# EAGLE board Layout_MON-14 (EAGLE 9.7.0)
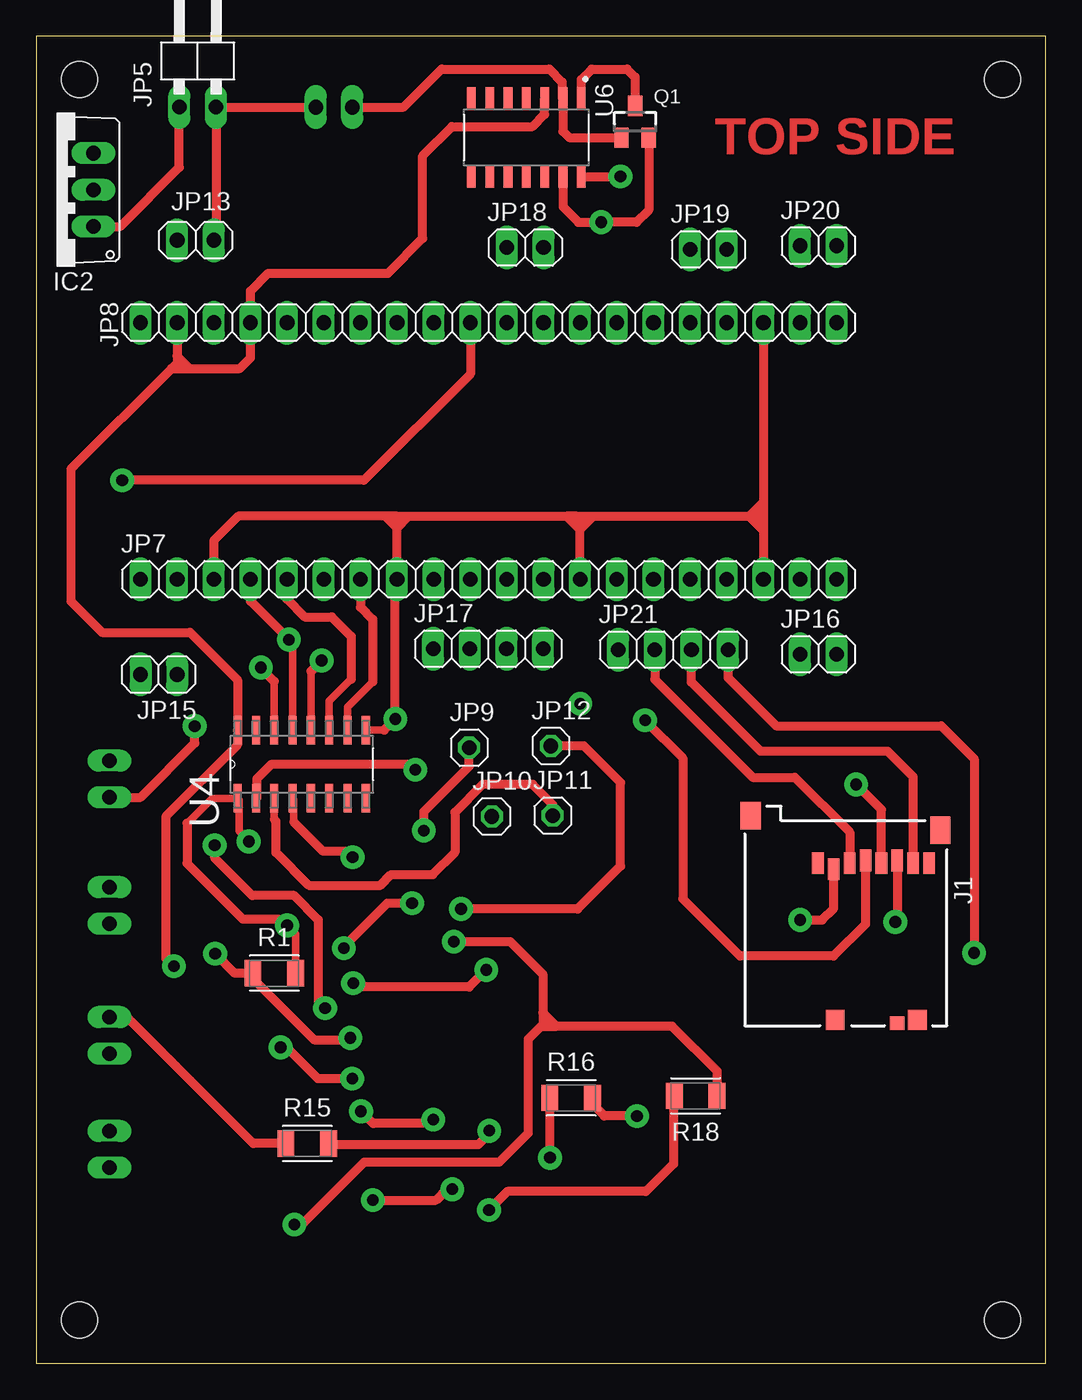
[diagram p0: board, top side]
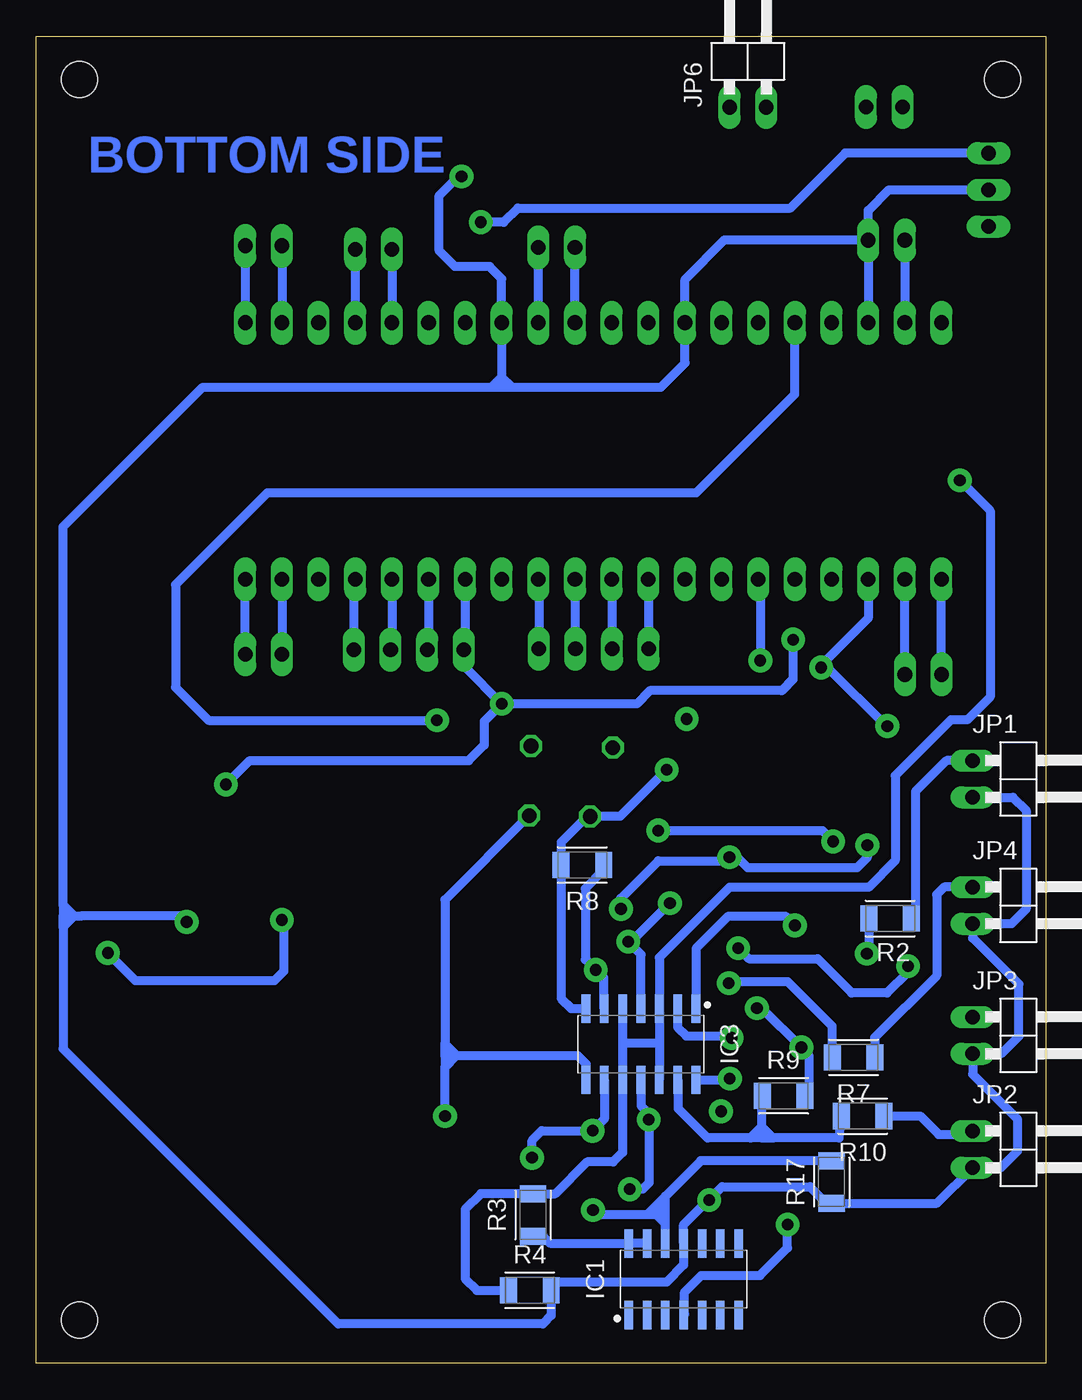
[diagram p1: board, bottom side, seen from below]

Size 70 x 92 mm. Coordinates in mm from the lower left corner, seen from the top.
Outline: 0,0 70,0 70,92 0,92 0,0
Copper layers (1*16): Top 0.035mm / dielectric 1.5mm / Bottom 0.035mm
Design rules "default *": minimum track width 20mil, minimum drill 32mil, track to track 24mil, track to pad 24mil, pad to pad 24mil, via to via 24mil, smd to smd 24mil, copper to edge 40mil, drill to drill 24mil, minimum pad ring 10mil, minimum via ring 8mil, stop-mask expansion 4mil, vias tented up to drill 0mil, thermal gap 10mil
Holes 2.5 mm at 3,89 67,89 3,3 67,3

## Footprints (pad centres in the part's own frame; a part is rotated, then mirrored left to right if it is on the bottom)
SOIC127P600X175-14N = smd 1.968 x 0.599: 1 -2.473,3.81; 2 -2.473,2.54; 3 -2.473,1.27; 4 -2.473,0; 5 -2.473,-1.27; 6 -2.473,-2.54; 7 -2.473,-3.81; 8 2.473,-3.81; 9 2.473,-2.54; 10 2.473,-1.27; 11 2.473,0; 12 2.473,1.27; 13 2.473,2.54; 14 2.473,3.81
TO220V = drill 1.016 long: 1 -2.54,-2.54; 2 0,-2.54; 3 2.54,-2.54
GCT_MEM2051-00-195-00-A = smd 0.8 x 1.5: 1 1.94,-3.66; 2 0.84,-3.26; 3 -0.26,-3.66; 4 -1.36,-3.86; 5 -2.46,-3.66; 6 -3.56,-3.86; 7 -4.66,-3.66; 8 -5.76,-3.66 | smd 1 x 0.95: 9 -3.56,7.425 | smd 1.3 x 1.4: P1 -4.95,7.2; P2 0.75,7.2 | smd 1.4 x 1.9: P3 6.6,-6.95; P4 -6.55,-5.95
1X02/90 = drill 1.016 long: 1 -1.27,-3.81; 2 1.27,-3.81
1X20 = drill 1.016 long: 1 -24.13,0; 2 -21.59,0; 3 -19.05,0; 4 -16.51,0; 5 -13.97,0; 6 -11.43,0; 7 -8.89,0; 8 -6.35,0; 9 -3.81,0; 10 -1.27,0; 11 1.27,0; 12 3.81,0; 13 6.35,0; 14 8.89,0; 15 11.43,0; 16 13.97,0; 17 16.51,0; 18 19.05,0; 19 21.59,0; 20 24.13,0
1X01 = drill 1.016 octagon: 1 0,0
1X02 = drill 1.016 long: 1 -1.27,0; 2 1.27,0
1X04 = drill 1.016 long: 1 -3.81,0; 2 -1.27,0; 3 1.27,0; 4 3.81,0
SSOT-3 = smd 1 x 1.4: 1 -0.95,-1.1; 2 0.95,-1.1; 3 0,1.1
RESC3216X70 = smd 1.165 x 1.815: 1 -1.475,0; 2 1.475,0
SOIC127P600X175-16N = smd 1.981 x 0.559: 1 -2.362,4.445; 2 -2.362,3.175; 3 -2.362,1.905; 4 -2.362,0.635; 5 -2.362,-0.635; 6 -2.362,-1.905; 7 -2.362,-3.175; 8 -2.362,-4.445; 9 2.362,-4.445; 10 2.362,-3.175; 11 2.362,-1.905; 12 2.362,-0.635; 13 2.362,0.635; 14 2.362,1.905; 15 2.362,3.175; 16 2.362,4.445
SOIC127P600X175-14N' = smd 1.55 x 0.6: 1 -2.7,3.81; 2 -2.7,2.54; 3 -2.7,1.27; 4 -2.7,0; 5 -2.7,-1.27; 6 -2.7,-2.54; 7 -2.7,-3.81; 8 2.7,-3.81; 9 2.7,-2.54; 10 2.7,-1.27; 11 2.7,0; 12 2.7,1.27; 13 2.7,2.54; 14 2.7,3.81

## Placement (x,y rotation side)
IC1  LM324_SOIC  [SOIC127P600X175-14N]  25.11,5.84 90 bottom
IC2  LM7805_TO220V  [TO220V]  1.44,81.35 90 top
IC3  LM324_SOIC  [SOIC127P600X175-14N]  28.07,22.13 270 bottom
J1  MEM2051-00-195-00-A  [GCT_MEM2051-00-195-00-A]  56.13,31.01 180 top
JP1  PINHD-1X2/90  [1X02/90]  1.27,40.51 270 bottom
JP2  PINHD-1X2/90  [1X02/90]  1.27,14.84 270 bottom
JP3  PINHD-1X2/90  [1X02/90]  1.27,22.73 270 bottom
JP4  PINHD-1X2/90  [1X02/90]  1.27,31.75 270 bottom
JP5  PINHD-1X2/90  [1X02/90]  11.2,90.91 0 top
JP6  PINHD-1X2/90  [1X02/90]  20.65,90.88 0 bottom
JP7  PINHD-1X20  [1X20]  31.37,54.36 0 top
JP8  PINHD-1X20  [1X20]  31.37,72.14 0 top
JP9  PINHD-1X1  [1X01]  30.02,42.68 0 top
JP10  PINHD-1X1  [1X01]  31.6,37.92 0 top
JP11  PINHD-1X1  [1X01]  35.81,37.97 0 top
JP12  PINHD-1X1  [1X01]  35.69,42.8 0 top
JP13  PINHD-1X2  [1X02]  11.05,77.85 0 top
JP15  PINHD-1X2  [1X02]  8.51,47.75 180 top
JP16  PINHD-1X2  [1X02]  54.23,49.15 0 top
JP17  PINHD-1X4  [1X04]  31.34,49.53 0 top
JP18  PINHD-1X2  [1X02]  33.91,77.34 0 top
JP19  PINHD-1X2  [1X02]  46.61,77.22 0 top
JP20  PINHD-1X2  [1X02]  54.23,77.47 0 top
JP21  PINHD-1X4  [1X04]  44.16,49.47 0 top
Q1  FDN306P  [SSOT-3]  41.53,86.06 0 top
R1  47000  [RESC3216X70]  16.51,27.05 0 top
R2  1200  [RESC3216X70]  10.79,30.84 180 bottom
R3  1200  [RESC3216X70]  35.56,10.29 90 bottom
R4  33000  [RESC3216X70]  35.77,5.06 0 bottom
R7  1200  [RESC3216X70]  13.34,21.21 180 bottom
R8  33000  [RESC3216X70]  32.13,34.54 180 bottom
R9  33000  [RESC3216X70]  18.19,18.54 0 bottom
R10  1200  [RESC3216X70]  12.7,17.14 180 bottom
R15  1200  [RESC3216X70]  18.8,15.24 0 top
R16  33000  [RESC3216X70]  37.08,18.41 0 top
R17  470  [RESC3216X70]  14.86,12.57 90 bottom
R18  33000  [RESC3216X70]  45.72,18.54 180 top
U4  MCP3208-BI/SL  [SOIC127P600X175-16N]  18.41,41.53 90 top
U6  SN74LV32ADR  [SOIC127P600X175-14N']  33.98,84.97 270 top

## Library data of the parts
IC1 IC3 = IC_Linear; CATEGORY: Amplifier; DESCRIPTION: Quad-Operational Amplifiers; MANUFACTURER: Generic; MPN: Generic; SERIES: LM324; SUB-CATEGORY: OpAmp; TYPE: Quad
IC2 = IC_Power-Management; CATEGORY: IC_Linear; DESCRIPTION: 5V Voltage Regulator; MANUFACTURER: Generic; MPN: Generic; SERIES: LM7805; SUB-CATEGORY: Voltage Regulator; TYPE: 5V
J1 = MEM2051-00-195-00-A; MANUFACTURER: GCT
JP1-JP13 JP15-JP21 = Connector; CATEGORY: CONNECTOR; SUB-CATEGORY: PIN-HEADER
Q1 = FDN306P
R1-R4 R7-R10 R15-R18 = Resistor; CATEGORY: Resistor; SUB-CATEGORY: Fixed
U4 = MCP3208-BI_SL; MPN: MCP3208-BI/SL; OC_FARNELL: 1084270; OC_NEWARK: 69K7605; PACKAGE: SOIC16; SUPPLIER: Microchip
U6 = SN74LV32ADR; MANUFACTURER: Texas Instruments; PACKAGE: SOIC127P600X175-14N

## Nets
+1.25V: IC3.3 IC3.5 IC3.10 IC3.12 JP8.10 R3.2 R4.1
+9V: IC2.1 JP5.1
+VO: JP6.1 Q1.1 U6.2
CLK: J1.5 JP7.4 JP7.14 JP21.1 U4.13
CSN_M: JP7.7 U4.10
CSN_W: J1.2 JP7.17 JP21.4
DIN: JP7.5 U4.11
DOUT: JP7.6 U4.12
GND: IC1.11 IC2.2 IC3.11 J1.6 JP1.2 JP2.2 JP3.2 JP4.2 JP5.2 JP6.2 JP7.3 JP7.8 JP7.13 JP7.18 JP8.3 JP8.8 JP8.13 JP8.18 JP13.2 R4.2 R17.1 U4.9 U4.14 U6.14
N$1: JP8.20 JP20.2
N$2: JP8.19 JP20.1
N$3: JP8.17 JP19.2
N$4: IC3.6 R7.2 R8.1
N$5: IC3.9 R15.2 R16.1
N$6: JP8.16 JP19.1
N$7: JP7.9 JP17.1
N$8: IC3.2 R1.1 R2.2
N$9: IC3.13 R9.1 R10.2
N$10: JP7.10 JP17.2
N$11: JP7.11 JP17.3
N$12: JP7.12 JP17.4
N$13: IC1.12 R17.2 R18.2
N$15: JP7.19 JP16.1
N$16: JP7.20 JP16.2
N$17: JP7.1 JP15.2
N$18: JP7.2 JP15.1
N$19: JP8.11 JP18.1
N$20: JP8.12 JP18.2
SI: J1.3 JP7.15 JP21.2
SO: J1.7 JP7.16 JP21.3
V_BIAS: IC1.13 IC1.14 R3.1
VDD: J1.4 JP8.5
VIN_B: JP4.1 R7.1
VIN_N: JP2.1 R10.1
VIN_R: JP1.1 R2.1
VIN_Y: JP3.1 R15.1
VO_PMOS: Q1.3 U6.1
VOUT_B: IC3.7 JP10.1 R8.2 U4.2
VOUT_N: IC3.14 JP12.1 R9.2 U4.4
VOUT_R: IC3.1 JP9.1 R1.2 U4.1
VOUT_Y: IC3.8 JP11.1 R16.2 U4.3
VSUPPLY: IC1.4 IC3.4 JP8.2 JP8.4 JP13.1 R18.1 U4.16 U6.3
VSUPPLY_BACKUP: IC2.3 Q1.2 U6.13

## Tracks (layer width: path | path; a pad name or v marks a point on that pad's centre or on a via)
+1.25V  (via drill 0.81 pad 1.65)
  Top 0.61: JP8.10 30.1,68.58 22.73,61.21 v5.97,61.21
  Bottom 0.61: v5.97,61.21 3.86,59.11 3.86,46.2 5.46,44.6 6.59,44.6 10.44,40.75 10.44,34.84 12.29,32.99 21.93,32.99 26.8,28.13 IC3.3 26.8,22.2 | R4.1 39.45,5.06 40.26,5.87 40.26,10.67 39.16,11.76 R3.2 34.01,11.76 31.8,13.97 30,13.97 29.34,14.63 IC3.10 29.34,22.2 | 26.8,22.2 IC3.12 | IC3.5 29.34,22.2 | 26.8,22.2 29.34,22.2
+9V
  Top 0.61: JP5.1 9.93,82.91 5.83,78.81 IC2.1
+VO
  Top 0.61: JP6.1 25.48,87.07 28.12,89.71 35.58,89.71 36.47,88.82 36.47,87.72 U6.2 36.52,85.4 36.96,84.96 Q1.1
CLK  (via drill 0.81 pad 1.65)
  Top 0.508: U4.13 17.78,49.91
  Top 0.61: 58.59,34.21 J1.5 58.59,38.38 v56.84,40.13 | JP7.4 14.86,52.83 v17.53,50.16 17.78,49.91
  Bottom 0.61: 40.35,54.27 JP7.14 40.26,49.56 | v37.72,45.72 38.94,44.5 38.94,42.85 40.01,41.78 55.19,41.78 v56.84,40.13 | 17.53,50.04 v17.53,50.16 17.53,47.42 18.31,46.63 27.45,46.63 28.36,45.72 v37.72,45.72 | 40.26,49.56 JP21.1 | v37.72,45.72 40.26,48.26 40.26,49.56
CSN_M
  Top 0.508: U4.10 21.59,45.48 23.34,47.23
  Top 0.61: JP7.7 22.48,52.43 23.34,51.56 23.34,47.23
CSN_W  (via drill 0.81 pad 1.65)
  Top 0.61: JP21.4 47.97,47.54 51.31,44.2 62.74,44.2 65.02,41.91 v65.02,28.45 | v52.96,30.73 54.48,30.73 55.29,31.55 J1.2
  Bottom 0.61: JP7.17 47.97,54.27 JP21.4 | v65.02,28.45 63.12,26.54 53.47,26.54 52.83,27.18 52.83,30.61 v52.96,30.73
DIN
  Top 0.508: 21.84,47.44 20.32,45.91 U4.11
  Top 0.61: JP7.5 17.4,52.97 18.62,51.74 20.5,51.74 21.84,50.39 21.84,47.44
DOUT  (via drill 0.81 pad 1.65)
  Top 0.508: U4.12 19.05,47.97
  Top 0.61: 19.05,47.97 v19.8,48.72
  Bottom 0.61: JP7.6 19.8,54.22 v19.8,48.72
GND  (via drill 0.81 pad 1.65)
  Top 0.508: U4.14 16.51,47.27 | 24.13,43.89 U4.9
  Top 0.61: 59.56,35 J1.6 59.69,30.74 v59.56,30.61 | 16.51,47.27 15.58,48.19 v15.58,48.23 | U6.14 v40.51,82.27 | v27.54,16.9 27.26,16.62 23.37,16.62 v22.52,17.48 | v23.34,11.32 27.71,11.32 28.47,12.08 v28.85,12.08 | 24.13,43.89 v24.9,44.66 24.9,54.23 JP7.8 25.02,57.91 | JP1.2 7.24,39.24 11,43 v11,44.17 | JP8.18 50.42,59.69 | 50.42,59.69 50.42,58.7 | 50.42,58.7 50.42,57.73 | 50.42,57.73 JP7.18 | 25.02,57.91 25.02,58.73 | 25.02,58.73 25.83,58.73 | 25.83,58.73 36.78,58.73 | 37.49,58.73 36.78,58.73 | 37.49,58.73 38.63,58.73 | 38.63,58.73 49.45,58.73 | 49.45,58.73 50.39,58.73 50.42,58.7 | 37.49,58.73 37.72,58.5 37.72,57.81 | JP7.13 37.72,57.81 | JP7.3 12.32,57.02 14.02,58.73 24.21,58.73 | 25.02,58.73 24.21,58.73 | 25.02,57.91 25.83,58.73 | 25.02,57.91 24.21,58.73 | 37.72,57.81 38.63,58.73 | 37.72,57.81 37.69,57.81 36.78,58.73 | 50.42,59.69 49.45,58.73 | 49.45,58.73 49.45,58.7 50.42,57.73 | JP13.2 12.47,78 JP5.2 12.49,87.07 JP6.2
  Bottom 0.61: IC3.11 28.07,17.86 27.54,17.33 v27.54,16.9 27.51,16.88 27.51,12.53 27.96,12.08 v28.85,12.08 | JP7.3 12.32,51.65 15.58,48.39 v15.58,48.23 15.14,48.23 11.07,44.17 v11,44.17 | JP1.2 2.29,39.24 1.37,38.33 1.37,31.49 2.39,30.48 JP4.2 5.08,29.49 1.88,26.29 1.88,22.68 3.1,21.46 JP3.2 5.08,20.04 1.96,16.92 1.96,14.73 3.12,13.57 JP2.2 7.55,11.1 R17.1 15.21,11.1 16.36,12.24 22.45,12.24 23.34,11.35 v23.34,11.32 23.41,11.32 25.11,9.62 IC1.11 25.11,6.82 26.28,5.65 34.03,5.65 34.29,5.39 R4.2 34.29,3.33 34.87,2.74 49.05,2.74 68.12,21.82 68.12,30.25 | v59.56,30.61 59.97,31.01 66.9,31.01 | 66.9,31.01 | 67.36,31.01 66.9,31.01 | 67.39,30.99 68.12,30.25 | 68.12,30.25 68.12,30.99 | 68.12,31.77 68.12,30.99 | 68.12,31.77 68.12,57.99 58.45,67.67 38.43,67.67 | 38.43,67.67 37.74,67.67 | 37.72,68.38 JP8.13 37.72,75.18 38.56,76.02 40.97,76.02 42.06,77.11 42.06,80.95 40.74,82.27 v40.51,82.27 | 37.72,68.38 37.72,67.69 37.74,67.67 | 68.12,31.77 67.36,31.01 | 67.36,31.01 67.39,30.99 | 67.39,30.99 68.12,30.99 | 37.74,67.67 37.01,67.67 | 37.01,67.67 26.7,67.67 25.02,69.34 JP8.8 25.02,75.13 22.28,77.88 12.34,77.88 JP13.2 | 37.72,68.38 37.01,67.67 | 37.72,68.38 38.43,67.67 | IC2.2 10.88,81.35 12.32,79.91 JP13.2 | JP13.2 JP8.3
N$1
  Bottom 0.61: JP20.2 JP8.20
N$2
  Bottom 0.61: JP20.1 JP8.19
N$3
  Bottom 0.61: JP19.2 JP8.17
N$4  (via drill 0.81 pad 1.65)
  Top 0.61: v31.21,27.27 30.02,26.09 22.25,26.09 v21.98,26.35
  Bottom 0.61: IC3.6 30.66,24.65 30.66,26.72 v31.21,27.27 31.93,27.99 31.93,32.92 30.66,34.19 R8.1 | R7.2 14.81,23.37 17.9,26.47 21.87,26.47 v21.98,26.35
N$5  (via drill 0.81 pad 1.65)
  Top 0.61: R16.1 35.61,14.27 v35.62,14.26 | R15.2 20.35,15.16 30.64,15.16 31.42,15.94 v31.42,16.13
  Bottom 0.61: v35.62,14.26 35.62,15.46 34.95,16.13 v31.42,16.13 30.61,16.94 IC3.9
N$6
  Bottom 0.61: JP19.1 JP8.16
N$7
  Bottom 0.61: JP7.9 27.53,54.33 JP17.1
N$8  (via drill 0.81 pad 1.65)
  Top 0.61: v12.41,28.4 13.77,27.05 R1.1 15.04,26.66 19.27,22.43 21.64,22.43 v21.78,22.57
  Bottom 0.61: v21.78,22.57 21.91,22.7 24.93,22.7 25.53,23.29 IC3.2 | v12.41,28.4 12.27,28.54 R2.2
N$9
  Bottom 0.61: R10.2 14.2,17.14 14.34,15.62 18.92,15.62 | IC3.13 25.48,19.6 25.48,17.65 23.45,15.62 20.47,15.62 | 19.68,15.62 20.47,15.62 | 19.81,18.39 R9.1 19.68,18.52 19.68,16.38 | 19.68,15.62 19.68,16.38 | 19.68,15.62 18.92,15.62 | 18.92,15.62 19.68,16.38 | 19.68,16.38 19.71,16.38 20.47,15.62
N$10
  Bottom 0.61: JP7.10 30.07,54.33 JP17.2
N$11
  Bottom 0.61: JP7.11 32.64,49.55 JP17.3
N$12
  Bottom 0.61: JP7.12 35.15,54.33 JP17.4
N$13  (via drill 0.81 pad 1.65)
  Top 0.61: R18.2 44.18,18.48 44.18,13.83 42.26,11.91 32.68,11.91 v31.39,10.63
  Bottom 0.61: 15.63,14.05 R17.2 23.93,14.05 26.38,11.59 | IC1.12 26.38,9.69 | 26.38,9.69 26.38,10.32 | 26.38,10.32 26.38,10.92 | 26.38,10.92 26.38,11.44 | 26.38,10.32 26.39,10.34 27.03,10.34 | 27.64,10.34 27.48,10.34 | 27.48,10.34 27.03,10.34 | v31.39,10.63 31.1,10.34 27.64,10.34 | 26.38,9.69 27.03,10.34 | 27.48,10.34 26.38,11.44 | 26.38,11.44 26.38,11.59 | 27.03,10.34 26.44,10.92 26.38,10.92 | 26.38,11.59 27.64,10.34
N$15
  Bottom 0.61: JP7.19 JP16.1
N$16
  Bottom 0.61: JP16.2 JP7.20
N$17
  Bottom 0.61: JP15.2 JP7.1
N$18
  Bottom 0.61: JP15.1 JP7.2
N$19
  Bottom 0.61: JP8.11 JP18.1
N$20
  Bottom 0.61: JP8.12 JP18.2
SI
  Top 0.61: J1.3 56.39,36.82 52.6,40.62 49.68,40.62 42.89,47.41 JP21.2
  Bottom 0.61: JP7.15 42.8,49.56 JP21.2
SO
  Top 0.61: J1.7 60.79,40.65 59.03,42.42 50.24,42.42 45.43,47.23 JP21.3
  Bottom 0.61: JP7.16 45.34,49.56 JP21.3
V_BIAS
  Bottom 0.61: IC1.13 IC1.14 28.94,8.34 34.38,8.34 34.85,8.81 R3.1
VDD  (via drill 0.81 pad 1.65)
  Top 0.61: v42.22,44.58 44.83,41.96 44.83,32.2 48.8,28.23 55.28,28.23 57.49,30.44 J1.4
  Bottom 0.61: JP8.5 17.42,72.11 17.42,67.16 24.26,60.33 53.98,60.33 60.33,53.98 60.33,46.86 58.04,44.58 v42.22,44.58
VIN_B
  Bottom 0.61: JP4.1 7.04,33.02 7.57,32.49 7.57,26.88 11.86,22.59 R7.1
VIN_N
  Bottom 0.61: R10.1 8.71,17.14 7.44,15.88 5.31,15.88 JP2.1
VIN_R
  Bottom 0.61: JP1.1 6.89,41.78 9.04,39.63 9.04,31.11 R2.1
VIN_Y
  Top 0.61: R15.1 15.06,15.24 6.3,24 JP3.1
VO_PMOS
  Top 0.61: U6.1 37.79,88.99 38.52,89.71 40.97,89.71 41.53,89.15 Q1.3
VOUT_B  (via drill 0.81 pad 1.65)
  Top 0.61: U4.2 15.29,39.22 15.29,40.51 16.28,41.5 25.93,41.5 v26.29,41.15
  Bottom 0.61: IC3.7 32.89,24.6 33.61,25.31 R8.2 33.61,36.12 31.81,37.91 JP10.1 29.52,37.91 v26.29,41.15
VOUT_N  (via drill 0.81 pad 1.65)
  Top 0.508: U4.4 17.86,39.09 17.86,37.54
  Top 0.61: v21.91,19.74 19.52,19.74 17.36,21.9 v16.95,21.9 | v12.38,35.92 12.38,35.03 14.99,32.42 17.89,32.42 19.56,30.76 19.56,25.11 v20.04,24.62 | v21.95,35.09 21.54,35.5 19.9,35.5 17.86,37.54 | v29.46,31.5 37.54,31.5 40.51,34.47 40.51,40.26 37.98,42.8 JP12.1
  Bottom 0.61: R9.2 16.43,18.82 16.43,21.39 v16.95,21.9 19.67,24.62 v20.04,24.62 | IC3.14 22,19.65 v21.91,19.74 | v12.38,35.92 12.38,35.07 13.08,34.37 20.68,34.37 21.41,35.09 v21.95,35.09 22.2,34.84 26.86,34.84 29.46,32.23 v29.46,31.5
VOUT_R  (via drill 0.81 pad 1.65)
  Top 0.508: 10.46,37.43 12.2,39.17 U4.1 14.07,39.06 14.07,36.9 14.74,36.23 | R1.2 17.98,29.78 17.52,30.24
  Top 0.61: 18.18,27.32 18.18,27.25 R1.2 | 17.32,30.24 16.78,30.78 14.34,30.78 10.46,34.66 10.46,37.43 | 17.32,30.24 17.29,30.24 v17.4,30.35 | 17.32,30.24 17.52,30.24 | 14.74,36.23 v14.74,36.18 | v26.87,36.93 26.87,38.23 30.02,41.38 JP9.1
  Bottom 0.61: v17.4,30.35 18.06,31.01 22,31.01 24.26,28.75 IC3.1 | v14.74,36.18 15.49,36.93 v26.87,36.93
VOUT_Y  (via drill 0.81 pad 1.65)
  Top 0.508: 16.51,37.7 U4.3
  Top 0.61: JP11.1 35.81,38.73 34.42,40.13 30.96,40.13 29.03,38.2 29.03,35.43 27.49,33.88 24.62,33.88 23.88,33.15 18.9,33.15 16.64,35.41 16.64,37.58 16.51,37.7 | v41.66,17.14 39.4,17.14 38.56,17.98 R16.2
  Bottom 0.61: IC3.8 31.88,20.75 32.47,21.34 40.84,21.34 | 41.66,21.34 40.84,21.34 | v41.66,17.14 41.66,20.52 | 41.66,21.34 41.66,20.52 | 41.66,21.34 41.66,22.15 | JP11.1 41.66,32.13 41.66,22.15 | 40.84,21.34 41.66,22.15 | 40.84,21.34 41.66,20.52
VSUPPLY  (via drill 0.81 pad 1.65)
  Top 0.61: U6.3 35.25,86.57 34.41,85.72 28.83,85.72 26.8,83.69 26.8,77.98 24.38,75.56 16.09,75.56 14.86,74.33 JP8.4 14.86,69.7 14.12,68.96 10.64,68.96 | 9.4,68.96 9.78,69.34 9.78,69.83 | 9.4,68.96 2.41,61.98 2.41,52.83 4.57,50.67 10.67,50.67 13.97,47.37 U4.16 13.97,42.87 8.99,37.9 8.99,28.07 9.53,27.53 v9.55,27.53 | JP8.2 9.78,69.83 | 35.13,23.37 36.07,23.37 | 36.07,23.37 44.09,23.37 47.2,20.27 R18.1 | 35.13,23.37 35.01,23.37 34.11,22.47 34.11,15.95 32.1,13.94 22.75,13.94 18.43,9.63 v17.91,9.63 | 35.13,24.31 35.13,26.98 32.87,29.23 v28.96,29.23 | 35.13,24.31 35.13,23.37 | v21.34,28.78 21.29,28.83 24.36,31.9 v26.06,31.9 | 9.4,68.96 10.64,68.96 | 35.13,24.31 36.07,23.37 | 9.78,69.83 10.64,68.96
  Bottom 0.61: JP13.1 JP8.2 | IC1.4 25.05,3.42 25.05,4.93 23.89,6.1 19.81,6.1 17.91,8 v17.91,9.63 | IC3.4 28.07,28.35 v28.96,29.23 28.73,29.23 v26.06,31.9 | v9.55,27.53 9.55,27.15 11.02,25.68 13.46,25.68 15.82,28.04 20.57,28.04 21.31,28.78 v21.34,28.78
VSUPPLY_BACKUP  (via drill 0.81 pad 1.65)
  Top 0.61: U6.13 36.53,80.17 37.6,79.1 v39.17,79.1 41.63,79.1 42.48,79.94 Q1.2
  Bottom 0.61: v39.17,79.1 37.6,79.1 36.61,80.09 17.7,80.09 13.9,83.89 IC2.3

## Text on the board
Top: TOP SIDE
Bottom: BOTTOM SIDE